# Altium PCB F4SDR2.PcbDoc (part 3 of 3)
Units mil, origin at the board's own origin, x right, y up, seen from the top; angles counter-clockwise.
Board outline 1676.41 x 2432 mil, 6 copper layers (Top Layer, GND1, PWR, PWR2/GND2, Signal Layer 1, Bottom Layer), stack 46.185 mil thick; 213 components, 239 nets, 1245 pads, 805 vias.
Unrouted connection lines stored in the file: 91.
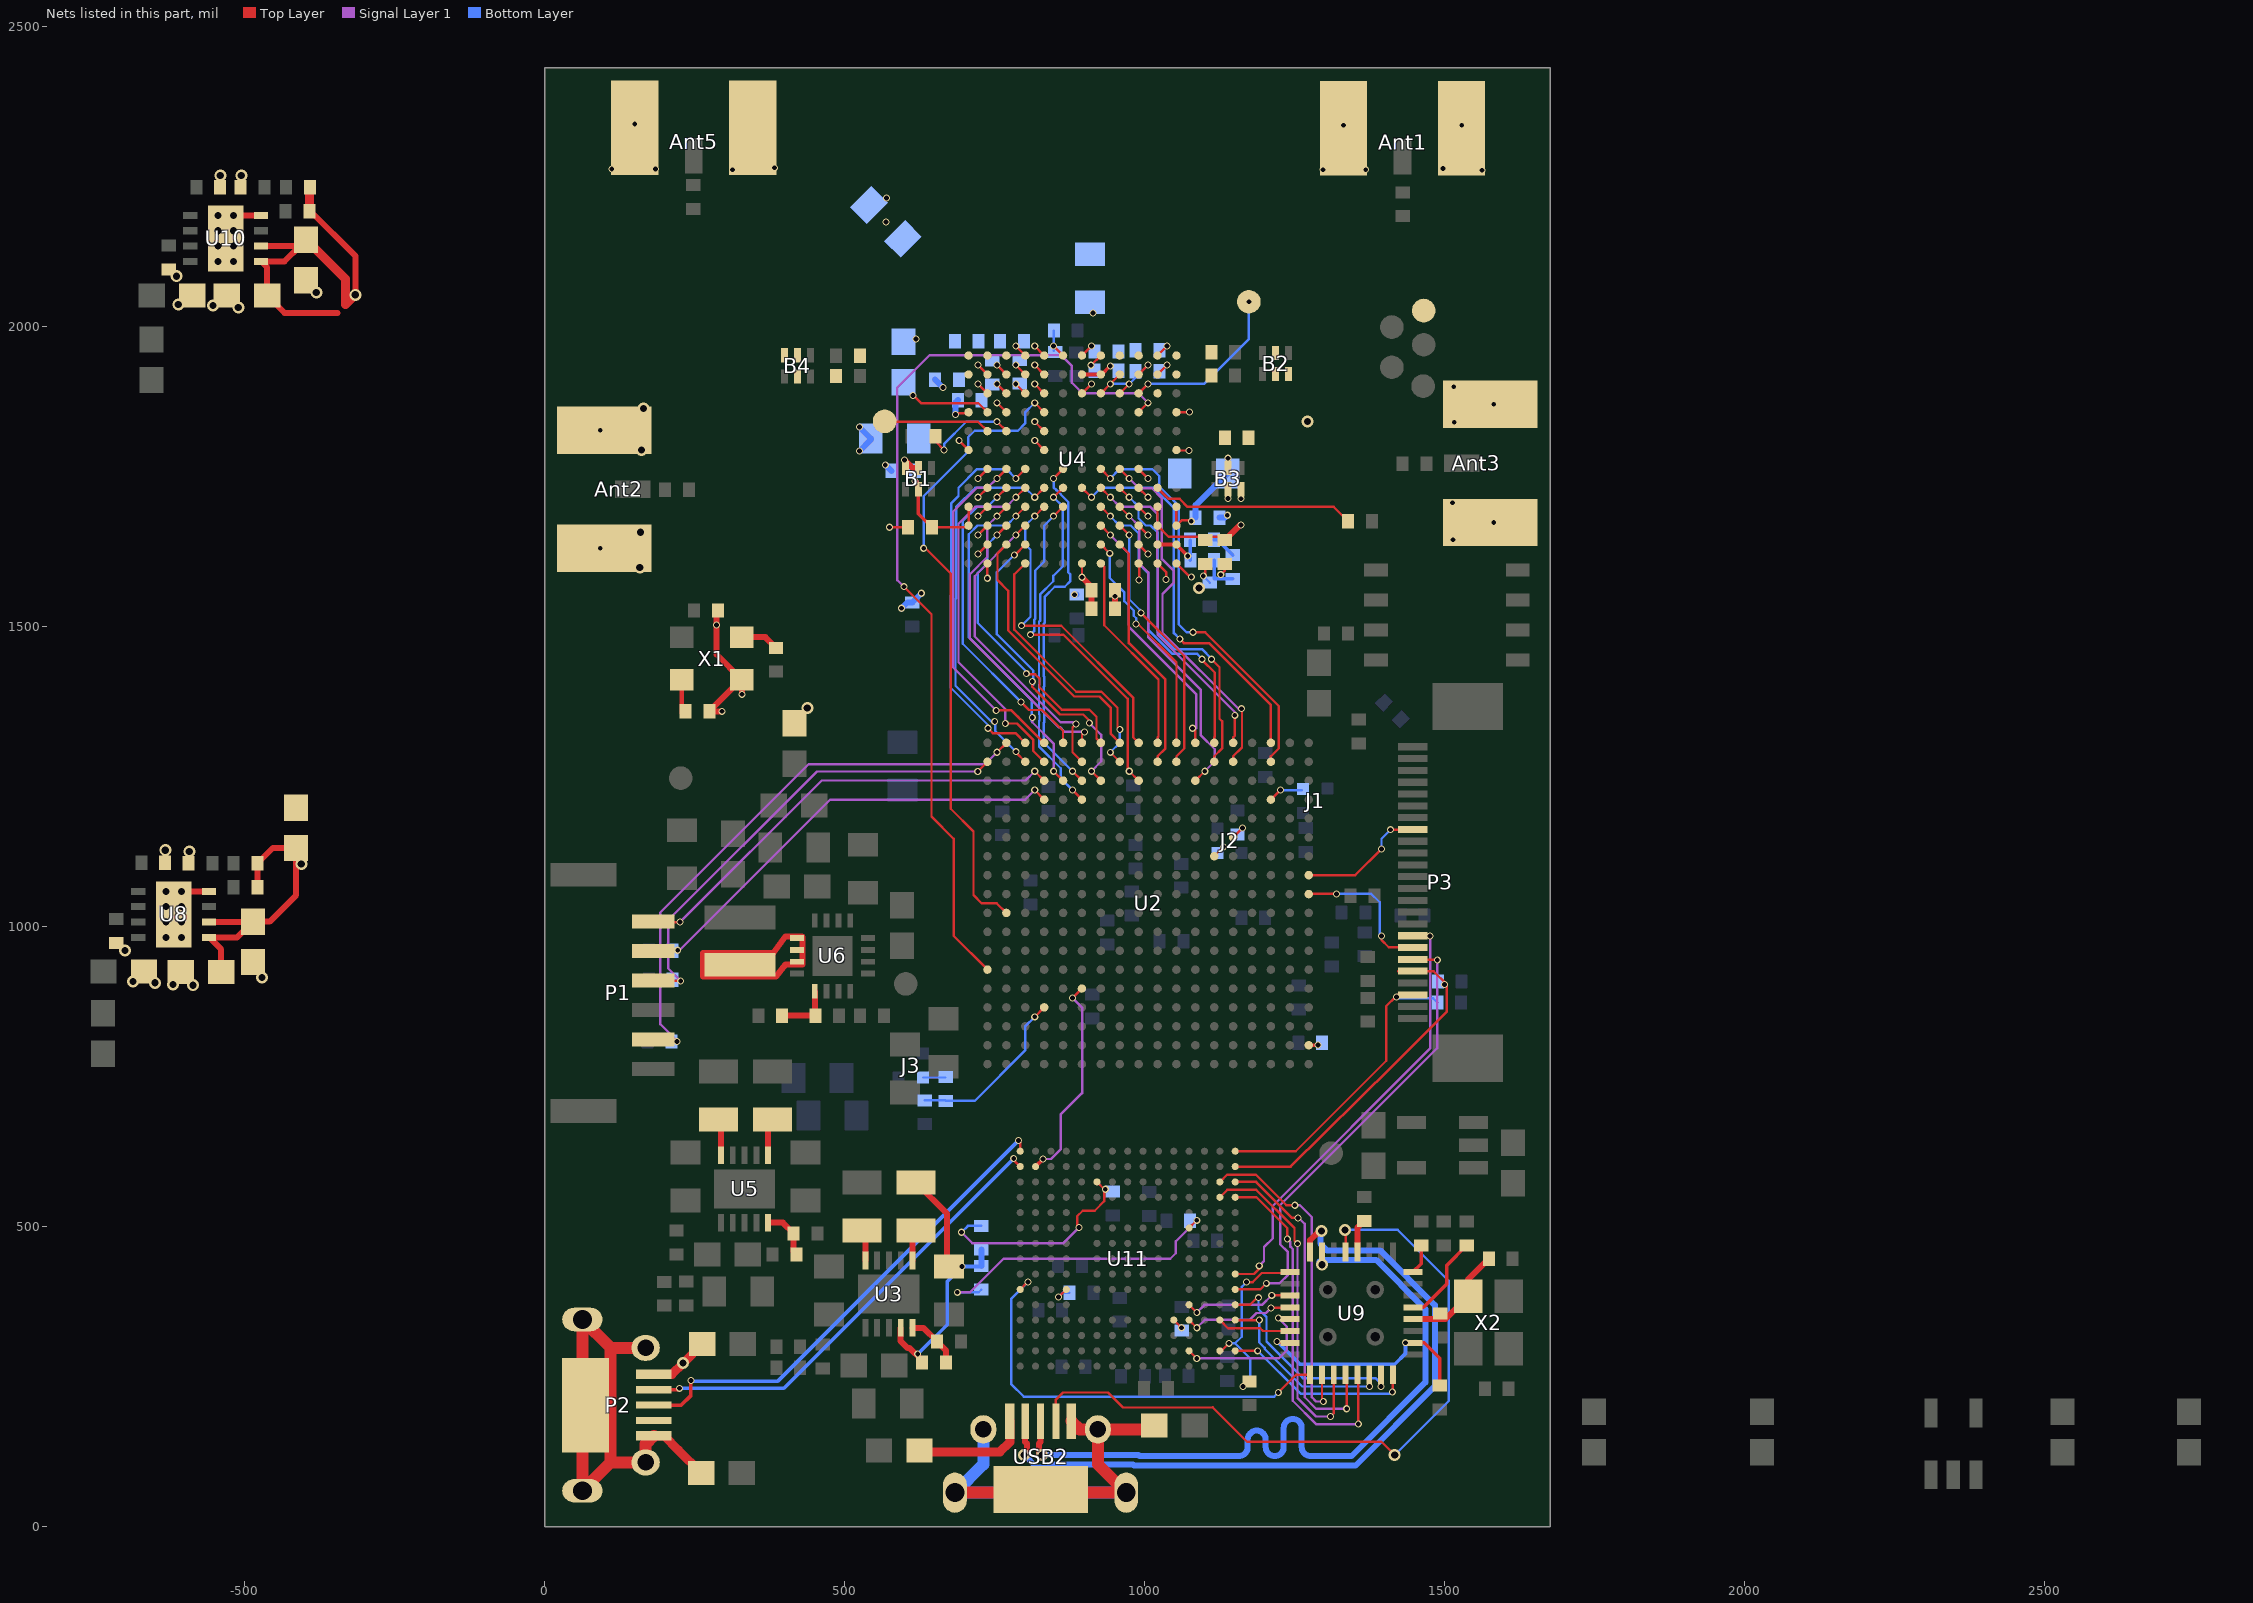
[diagram p7: the nets of this part, all layers, seen from the top]

## Via types
v1: diameter 11.81, hole 7.87, Top Layer to Bottom Layer, 680 vias
v2: diameter 20, hole 12, Top Layer to Bottom Layer, 104 vias
v3: diameter 19.68, hole 11.81, Top Layer to Bottom Layer, 20 vias
v4: diameter 12, hole 8, Top Layer to Bottom Layer, 1 vias

## Nets (pads, with @x,y where several pads share a name; then routed paths per layer and width w, separated by ;. In a path a pad name is that pad's centre, name@x,y a point inside that pad or via, vN(x,y) a via of type N, cw(c..) or ccw(c..) an arc to the next point about the centre after c; other vN are vias at no path point) (continued)
NetC66_1: C66.1 R39.1 | length 41.8
  Bottom Layer w6: R39.1@1115.68,1645 1121.68,1645 C66.1@1147,1619.68
NetC67_1: C67.1 R39.2 U4.A11 U4.B11 | length 91.9
  Top Layer w6: U4.B11@1021.73,1637.27 1052.73,1637.27 v1(1072,1618)
  Bottom Layer w6: C67.1@1076.32,1611 R39.2@1076.32,1644.68
NetC72_2: C72.2 U4.A1
NetC77_2: C77.2 U4.A2
NetC84_2: C84.2 U4.M1
NetC86_1: C86.1 U4.M2
NetC110_2: C110.2 R61.1 U9.28 X2.1 | length 184.9
  Top Layer w10: U9.28@1447.36,346.16 1501.39,346.16 X2.1@1539.54,384.31 1539.54,412.54 C110.2@1574,447
NetC111_1: C111.1 U9.29 | length 150.8
  Top Layer w6: U9.29@1447.36,365.84 1464.84,365.84 1504,405 1504,436.32 C111.1@1537,469.32
NetC112_1: C112.1 U9.15 U9.26 | length 378.4
  Top Layer w4: v1(1221,309) 1223.21,306.79 U9.15@1242.64,306.79
  Top Layer w6: U9.26@1447.36,306.79 1466.21,306.79 1492,281 C112.1@1492,235.68
  Bottom Layer w6: v1(1221,309) 1259,271 1417,271 1435,289 v1(1435,307)
NetC113_1: C113.1 X1.3 | length 64.2
  Top Layer w10: X1.3@329.01,1482.75 368.07,1482.75 C113.1@385.82,1465
NetJ1_2: J1.2 U2.T15 | length 57.8
  Top Layer w4: U2.T15@1210.72,1212.23 v1(1226.47,1227.98)
  Bottom Layer w4: v1(1226.47,1227.98) J1.2@1261.98,1227.98
NetJ2_2: J2.2 U2.N12 | length 22.3
  Top Layer w4: U2.N12@1116.24,1117.74 v1(1131.98,1133.49)
NetJ3_2: J3.2 R42.1 | length 37.3
  Bottom Layer w4: J3.2@631,749 R42.1@668.32,749
NetL1_1: L1.1 U5.6 | length 52.5
  Top Layer w10: U5.6@372.75,619.28 L1.1@372.75,671.75
NetL2_1: L2.1 U5.10 | length 55.7
  Top Layer w10: U5.10@294.01,619.28 L2.1@294.01,674.99
NetL3_1: L3.1 U3.6 | length 44.3
  Top Layer w10: U3.6@613.4,444.13 L3.1@613.4,488.4
NetL4_1: L4.1 U3.10 | length 44.2
  Top Layer w10: U3.10@534.66,444.13 L4.1@534.66,488.34
NetL13_1: L13.1 U6.1 U6.2 U6.3 | length 442.3
  Top Layer w10: 263.78,917.32 263.78,956.69 381.89,956.69 401.57,984.25 429.13,984.25 430.11,983.28 430.11,937.01 401.57,937.01 385.83,917.32 263.78,917.32
NetP2_1: P2.1 R48.2 | length 101.7
  Top Layer w15: P2.1@182.32,254.18 212.18,254.18 v2(231,273) R48.2@263,305
NetP2_5: P2.5 R49.2 | length 880.8
  Top Layer w15: P2.5@182.32,151.82 199.18,151.82 223,128 R49.2@261,90
  Top Layer w20: P2.5@168.54,298.47 110.27,298.47 ; P2.5@182.32,151.82 168.54,138.04 P2.5@168.54,107.53 110.27,107.53 ; 110.27,107.53 P2.5@63.02,60.28 P2.5@63.02,345.72 110.27,298.47 ; 110.27,107.53 110.27,298.47
NetR1_2: R1.2 R11.1 U3.5 | length 91.5
  Top Layer w10: U3.5@613.4,331.88 631.43,331.88 R11.1@654.31,309 669,294.31 R1.2@669,274
NetR5_2: R5.2 R16.1 U5.5 | length 80.4
  Top Layer w10: U5.5@372.75,507.04 397.27,507.04 R16.1@415.31,489 R5.2@415.31,458.69
NetR8_2: R8.2 R18.1 U6.5 | length 95.2
  Top Layer w10: R8.2@396,852 R18.1@451.31,852 ; R18.1@450.45,852.87 U6.5@450.45,892.71
NetR13_2: R13.2 U11.D6 | length 39.1
  Top Layer w4: v1(856.84,383.02) U11.D6@869.64,395.82
  Bottom Layer w4: v1(856.84,383.02) 863.82,390 R13.2@875,390
NetR19_1: R19.1 U4.B8 | length 340.7
  Top Layer w4: U4.B8@1021.73,1731.76 1040.23,1713.26 1058.61,1713.26 1071.87,1700 1315.32,1700 R19.1@1339.32,1676
NetR22_2: R22.2 U11.L4 | length 18.1
  Top Layer w4: U11.L4@1048.77,344.64 v1(1061.57,331.84)
NetR34_1: R34.1 X1.1 | length 55.4
  Top Layer w8: R34.1@228.62,1356.43 X1.1@228.62,1411.88
NetR35_1: R35.1 U4.L4 | length 135.7
  Top Layer w4: v1(614.17,1885.83) 614.71,1885.83 627.54,1873 723.01,1873 U4.L4@738.27,1857.74
NetR40_1: R40.1 U4.K5 | length 155.9
  Top Layer w4: R40.1@651.68,1809.31 v1(666,1795) ; v1(754.02,1841.99) U4.K5@769.76,1826.24
  Bottom Layer w4: v1(666,1795) 666,1805 702.99,1841.99 v1(754.02,1841.99)
NetR41_1: R41.1 U2.P13 | length 22.3
  Top Layer w4: U2.P13@1147.73,1149.24 v1(1163.48,1164.98)
NetR42_2: R42.2 R45.2 U2.D4 | length 285.7
  Top Layer w4: v1(817.02,850.02) U2.D4@832.77,865.77
  Bottom Layer w4: R45.2@634,711 R42.2@668,711 ; R42.2@669,710 717,710 801,794 801,834 v1(817.02,850.02)
NetR46_2: R46.2 USB2.1 | length 194.4
  Top Layer w15: R46.2@625,124.91 759.09,124.91 775.59,141.42 USB2.1@775.59,176.32
  Top Layer w20: R46.2@625,124.91 R46.2@625,127
NetR47_1: R47.1 USB2.5 | length 958.9
  Top Layer w20: USB2.5@684.06,57.02 USB2.5@969.49,57.02 922.24,104.27 USB2.5@922.24,162.54 ; USB2.5@877.95,176.32 891.73,162.54 USB2.5@922.24,162.54 ; R47.1@1010.07,162.54 USB2.5@922.24,162.54
  Bottom Layer w20: USB2.5@731.3,162.54 731.3,104.27 USB2.5@684.06,57.02 USB2.5@969.49,57.02
NetR60_2: R60.2 U9.4 | length 56.3
  Top Layer w10: U9.4@1354.84,458.36 1354.84,498.84 R60.2@1366,510
NetR62_2: R62.2 U9.32 | length 49.8
  Top Layer w6: U9.32@1447.36,424.9 1461,438.54 R62.2@1461,469
NetT1_1: T1.1 U4.B3
NetT2_1: T2.1 U4.C3 | length 285.4
  Top Layer w4: U4.C3@990.24,1889.24 v1(1005.98,1904.98)
  Bottom Layer w4: v1(1005.98,1904.98) 1098.98,1904.98 1174,1980 v1(1174,2042) v1@1174,2044
NetT3_1: T3.1 U4.L5 | length 177.3
  Top Layer w4: T3.1@567.46,1841.99 722.52,1841.99 U4.L5@738.27,1826.24
NetU9_5: U9.5 USB2.4 | length 1220.9
  Top Layer w4: USB2.4@852.36,176.32 852.36,212.36 864,224 939,224 964,199 1113,199 ; 1113.5,199.5 1171,142 1395,142 v2(1417,120) ; v2(1334,495) 1335.16,493.84 U9.5@1335.16,458.36
  Bottom Layer w4: v2(1334,495) 1422,495 1507,410 1507,210 v2(1417,120)
PA13: P2.3 U11.A15 | length 825.5
  Top Layer w4: v1(790,644) 792.87,641.13 U11.A15@792.87,626.13
  Top Layer w6: P2.3@182.32,203 228,203 244,219 v1(244,244)
  Bottom Layer w6: v1(244,244) 244,243 389,243 v1(790,644)
PA14: P2.2 U11.A14 | length 781.8
  Top Layer w4: v1(782,614) 779,614 792.46,600.54 U11.A14@792.87,600.54
  Top Layer w6: P2.2@182.32,228.59 222.59,228.59 v1(225,231)
  Bottom Layer w6: v1(225,231) 399,231 v1(782,614)
PB3: P2.4
PCLK: P3.17 U2.V11 | length 215
  Top Layer w4: U2.V11@1273.72,1086.24 1351.24,1086.24 v1(1395,1130) ; v1(1410,1162) 1446.85,1162 P3.17@1447.23,1162.39
  Bottom Layer w4: v1(1395,1130) 1395,1147 v1(1410,1162)
PROGRAM: R9.2 U2.V2 | length 15.4
  Top Layer w6: U2.V2@1273.72,802.78 1288.78,802.78 v1(1289,803)
PWDN: P3.8 U11.R7 | length 750
  Top Layer w4: U11.R7@1151.13,421.41 1182.41,421.41 1195,434 1193.91,435.09 v1(1191.26,435.09) ; P3.8@1447.23,985.22 1475.78,985.22 v1(1476,985)
  Signal Layer 1 w4: v1(1191.26,435.09) 1199.09,442.93 1199.09,466.26 1213.91,481.07 1213.91,535.22 1476,797.31 v1(1476,985)
RESET: P3.6 U11.R6 | length 777.9
  Top Layer w4: U11.R6@1151.13,395.82 1192.82,395.82 v1(1203,406) ; P3.6@1447.23,945.85 1448.08,945 v1(1488,945)
  Signal Layer 1 w4: v1(1203,406) 1225,406 1239,420 1239,458 1226,471 1226,536 1488,798 v1(1488,945)
RFGND: Ant1.GND Ant2.GND Ant3.GND Ant5.GND B1.5 B1.6 B2.2 B2.5 B2.6 B3.5 B3.6 B4.2 B4.5 B4.6 C17.1 C18.1 C19.1 C21.1 C22.1 C23.1 C24.1 C25.1 C27.1 C28.1 C43.2 C47.2 C49.2 C50.2 C51.2 C52.2 C53.2 C54.1 C56.2 C57.2 C58.2 C59.2 C60.2 C61.2 C62.2 C63.2 C64.2 C65.2 C66.2 C67.2 C70.1 C73.2 C75.2 C80.2 C82.1 C83.2 C93.2 R24.2 R30.2 R34.2 R35.2 R52.1 R53.1 R54.1 R55.1 U4.A4 U4.A6 U4.A12 U4.B1 U4.B2 U4.B12 U4.C1 U4.C2 U4.C7 U4.C8 U4.C9 U4.C10 U4.C11 U4.C12 U4.D1 U4.E1 U4.F1 U4.F3 U4.G1 U4.H1 U4.H2 U4.H3 U4.H5 U4.H6 U4.J1 U4.J2 U4.K1 U4.K2 U4.L1 U4.L2 U4.L3 U4.L7 U4.L8 U4.L9 U4.L10 U4.L11 U4.L12 U4.M4 U4.M6 U8.0 U8.4 U10.0 U10.4 X1.2 | length 1613.5
  Top Layer w4: v1(575,1666) C75.2@606,1666 ; v1(684.91,1853.9) 682.8,1856 U4.M4@705.03,1856 ; v1(691.02,1810.5) U4.M6@706.77,1794.75 ; U4.M4@704.03,1855 U4.M4@705.03,1856 ; U4.M4@706.77,1857.74 U4.M4@705.03,1856 ; v1(722.52,1621.52) U4.L11@738.27,1637.27 ; v1(722.52,1653.02) U4.L10@738.27,1668.76 ; v1(722.52,1684.51) U4.L9@738.27,1700.26 ; v1(722.52,1716.01) U4.L8@738.27,1731.76 ; v1(722.52,1747.5) U4.L7@738.27,1763.25 ; v1(722.52,1904.98) U4.L3@738.27,1889.24 ; v1(722.52,1936.48) U4.L2@738.27,1920.73 ; v1(738,1581) 738,1605.5 U4.L12@738.27,1605.77 ; v1(754.02,1936.48) U4.K2@769.76,1920.73 ; v1(785.51,1936.48) U4.J2@801.26,1920.73 ; v1(785.51,1967.98) U4.J1@801.26,1952.23 ; v1(817.01,1810.5) U4.H6@832.76,1794.75 ; v1(817.01,1841.99) U4.H5@832.76,1826.24 ; v1(817.01,1904.98) U4.H3@832.76,1889.24 ; v1(817.01,1936.48) U4.H2@832.76,1920.73 ; v1(817.01,1967.98) U4.H1@832.76,1952.23 ; v1(848.5,1967.98) U4.G1@864.25,1952.23 ; U4.F3@895.75,1889.24 v1(911.5,1904.98) ; U4.F1@895.75,1952.23 v1(911.5,1967.98) ; v1(911,1936) U4.E1@927.24,1952.23 ; U4.C12@990.24,1605.77 991,1605.01 v1(991,1578) ; U4.C11@990.24,1637.27 v1(1005.98,1621.52) ; U4.C10@990.24,1668.76 v1(1005.98,1653.02) ; U4.C9@990.24,1700.26 v1(1005.98,1684.51) ; U4.C8@990.24,1731.76 v1(1005.98,1716.01) ; U4.C7@990.24,1763.25 v1(1005.98,1747.5) ; U4.C2@990.24,1920.73 v1(1005.98,1936.48) ; U4.B12@1021.73,1605.77 1036,1591.5 v1(1036,1579) ; U4.B2@1021.73,1920.73 v1(1037.48,1936.48) ; U4.B1@1021.73,1952.23 v1(1037.48,1967.98) ; U4.A12@1053.23,1605.77 1076,1583 v1(1078,1583) ; U4.A6@1053.23,1794.75 1053.98,1794 v1(1074,1794) ; U4.A4@1053.23,1857.74 1053.49,1858 v1(1075,1858) ; v1@1101,1588 C57.2@1101,1605 ; v1(1127,1587) 1134,1594 C56.2@1134,1605
  Top Layer w10: U8.0@-601.02,1059.26 U8.4@-558.97,1059.26 ; U10.0@-508.35,2185.84 U10.4@-472.29,2185.84 ; C93.2@288.82,1527.31 286.82,1525.31 v1(286.82,1503.31) 286.82,1454.08 X1.2@329.01,1411.88 ; v1(295.82,1359.31) R34.2@274.82,1359.31 327.38,1411.88 X1.2@329.01,1411.88 ; v1(329.01,1387.51) X1.2@329.01,1411.88 ; v1(599.91,1778.23) v1@601.35,1776.79 ; B1.6@601.35,1764.72 v1@601.35,1776.79 ; B1.5@623,1764.72 613.42,1764.72 v1@601.35,1776.79 ; C47.2@951,1530 951,1533 C43.2@951,1561 ; v1@951,1546.85 v1(951,1551.18) ; v1(1139,1714) B3.5@1139,1729.28 ; v1(1160.65,1713.65) B3.6@1160.65,1729.28
  Signal Layer 1 w4: v1@683.1,1853.9 v1(684.91,1853.9)
  Bottom Layer w4: C63.2@849,1960 C62.2@849,1994 ; v1(1098,1585) 1098,1584.69 R55.1@1109,1573.69
  Bottom Layer w6: R55.1@1116,1580.69 C67.2@1116,1611 ; R55.1@1116.69,1580 C66.2@1147,1580
  Bottom Layer w10: v1(525,1793) 544,1812 C82.1@544,1814 v1(525,1833) ; v1(568,1770) C83.2@578,1760 ; v1(595,1531) 604.68,1540.69 R54.1@613,1540.69 628,1555.69 v1(628,1556) ; C51.2@651,1912 v1(664,1899) ; v1(684.91,1853.9) 684.91,1873.91 C50.2@689,1878 ; v1(883.32,1553.69) R52.1@887,1553.69 ; C80.2@1125,1682 1134,1682 v1(1138,1686)
  other v1: 92.81,1630.95 1514.19,1645.11 1582.19,1674.11 1513.19,1707.11 92.81,1827.8 1516.19,1841.11 1582.19,1870.96 1515.19,1900.11 619,1980 569,2175 570,2215 1562.52,2261.13 313.17,2262.13 1297.52,2262.13 1368.52,2262.13 112.17,2263.13 185.17,2263.13 1497.52,2264.13 383.17,2265.13 1331.67,2336.13 1528.52,2336.13 150.32,2338.13
  other v2: -586.02,902.87 -619.02,903.87 -649.02,906.87 -686.02,908.87 -471.02,915.87 -699.02,960.87 -592.02,1125.87 -632.02,1127.87 438,1365 1091,1565 158.81,1598.8 159.81,1657.8 161.81,1794.8 1271.65,1842.52 164.81,1863.8 -510.35,2032.46 -552.35,2035.46 -610.35,2037.46 -380.35,2057.46 -613.35,2084.46 -540.35,2252.46 -505.35,2252.46
  other v3: -630.82,982.49 -605.23,982.49 -630.82,1008.08 -605.23,1008.08 -630.82,1033.67 -605.23,1033.67 -630.82,1059.26 -605.23,1059.26 -544.14,2109.07 -518.55,2109.07 -544.14,2134.66 -518.55,2134.66 -544.14,2160.25 -518.55,2160.25 -544.14,2185.84 -518.55,2185.84
RX_D0_N: U2.H18 U4.K11 | length 445.7
  Top Layer w4: U4.K11@769.76,1637.27 755,1622.5 755,1578 773,1560 773,1494 883,1384 925,1384 944,1365 944,1321.47 U2.H18@958.76,1306.72
RX_D0_P: U2.H17 U4.J12 | length 449.1
  Top Layer w4: U4.J12@801.26,1605.77 783.09,1587.61 783.09,1495.22 886.31,1392 928.31,1392 955,1365.31 955,1332 958,1329 v1(958.91,1329) ; v1(943,1290.98) U2.H17@958.76,1275.22
  Bottom Layer w4: v1(943,1290.98) 958.91,1306.88 v1(958.91,1329)
RX_D1_N: U2.G18 U4.K10 | length 494.5
  Top Layer w4: v1(754.02,1653.02) U4.K10@769.76,1668.76 ; v1@805.42,1424.42 808.93,1420.91 817.93,1420.91 824.91,1413.93 824.91,1399.41 862.31,1362 908.31,1362 920,1350.31 920,1313.98 U2.G18@927.26,1306.72
  Bottom Layer w4: v1(754.02,1653.02) 738,1637 738,1606 722,1590 722,1506.69 v1@801.34,1427.34
  other v1: 803,1422
RX_D1_P: U2.G16 U4.J11 | length 540.1
  Top Layer w4: v1(783,1620) 783.99,1620 U4.J11@801.26,1637.27 ; v1(813,1409) 813,1400 816.16,1396.84 820.84,1392.16 859,1354 898,1354 912,1340 v1(908,1340) ; v1(911.51,1259.47) U2.G16@927.26,1243.72
  Signal Layer 1 w4: v1(908,1340) 928,1320 928,1275.96 v1(911.51,1259.47)
  Bottom Layer w4: v1(783,1620) 754,1591 754,1487.84 814.91,1426.93 814.91,1403.55 813,1405.45 v1(813,1409)
RX_D2_N: U2.F18 U4.K9 | length 514.3
  Top Layer w4: v1(754.02,1684.51) U4.K9@769.76,1700.26 ; U2.F18@895.76,1306.72 895.76,1320.76
  Signal Layer 1 w4: v1(754.02,1684.51) 738,1668.5 738,1616.82 709,1587.82 709,1480.69 856.69,1333 859,1333 867,1325 v1(900,1325)
RX_D2_P: U2.F17 U4.J10 | length 520.8
  Top Layer w4: v1(785.51,1653.02) U4.J10@801.26,1668.76 ; v1(885.91,1338) 880,1332.09 880,1290.98 U2.F17@895.76,1275.22
  Signal Layer 1 w4: v1(785.51,1653.02) 717,1584.5 717,1484 860,1341 882,1341 885,1338 v1(885.91,1338)
RX_D3_N: U2.E18 U4.K8 | length 547.3
  Top Layer w4: v1(754.02,1716.01) U4.K8@769.76,1731.76 ; v1(794,1375) 807.55,1361.45 829.55,1361.45 864.12,1326.88 U2.E18@864.12,1306.72
  Bottom Layer w4: v1(754.02,1716.01) 738.01,1700 721,1700 697,1676 697,1472 v1(794,1375)
RX_D3_P: U2.E16 U4.J9 | length 601
  Top Layer w4: v1(785.51,1684.51) U4.J9@801.26,1700.26 ; v1(848.52,1259.47) U2.E16@864.27,1243.72
  Signal Layer 1 w4: v1(813,1349) 813,1341 848.52,1305.48 v1(848.52,1259.47)
  Bottom Layer w4: v1(785.51,1684.51) 770,1669 721.56,1669 707,1654.44 707,1483 812.41,1377.59 812.41,1343.05 813,1343.64 v1(813,1349)
RX_D4_N: U2.D18 U4.K7 | length 581.6
  Top Layer w4: v1(752.82,1360.82) 778.34,1360.82 789.07,1350.09 789.39,1350.09 U2.D18@832.77,1306.72 ; v1(754.02,1747.5) U4.K7@769.76,1763.25
  Signal Layer 1 w4: v1(752.82,1360.82) 681,1432.64 681,1692 721,1732 738.51,1732 v1(754.02,1747.5)
RX_D4_P: U2.D17 U4.J8 | length 603.4
  Top Layer w4: v1(768,1339) 787.5,1339 814.36,1312.14 814.36,1293.63 U2.D17@832.77,1275.22 ; v1(785.51,1716.01) U4.J8@801.26,1731.76
  Signal Layer 1 w4: v1(768,1339) 768,1363 690,1441 690,1672 718,1700 769.5,1700 v1(785.51,1716.01)
RX_D5_N: U2.C18 U4.J7 | length 643.4
  Top Layer w4: v1(739.08,1331.08) 747.16,1323 784.99,1323 U2.C18@801.28,1306.72 ; v1(785.51,1747.5) U4.J7@801.26,1763.25
  Bottom Layer w4: v1(739.08,1331.08) 741.34,1333.34 741.34,1334.34 677,1398.69 677,1551.66 678,1552.66 678,1705.5 677.75,1705.75 690,1718 690,1732 721,1763 770.02,1763 v1(785.51,1747.5)
RX_D5_P: U2.C17 U4.H8 | length 651.6
  Top Layer w4: v1(786,1292) 786,1290.5 U2.C17@801.28,1275.22 ; v1(817.01,1716.01) U4.H8@832.76,1731.76
  Bottom Layer w4: v1(786,1292) 750.99,1327.01 750.99,1341.54 v1(750.26,1342.26) 748,1340 747,1340 685,1402 685,1547 686,1548 686,1700 718,1732 801.02,1732 v1(817.01,1716.01)
RX_FRAME_N: U2.F16 U4.G7 | length 593.1
  Top Layer w4: v1(848.5,1747.5) U4.G7@864.25,1763.25 ; v1(880.02,1259.47) U2.F16@895.76,1243.72
  Bottom Layer w4: v1(848.5,1747.5) 848.5,1732.5 853.09,1727.91 853.44,1727.91 860.41,1720.94 860.41,1720.59 873,1708 873,1590.84 875.91,1587.93 875.91,1575.91 867,1567 850.31,1567 834,1550.69 834,1507.06 832.16,1505.22 832.16,1417.99 832.91,1417.25 832.91,1400.75 832.16,1400.01 832.16,1357.99 832.91,1357.25 832.91,1340.75 832.16,1340.01 832.16,1307.33 v1(880.02,1259.47)
RX_FRAME_P: U2.F15 U4.G8 | length 579.9
  Top Layer w4: v1(848.5,1716.01) U4.G8@864.25,1731.76 ; v1(880.02,1227.98) U2.F15@895.76,1212.23
  Bottom Layer w4: v1(848.5,1716.01) 864,1700.51 864,1601 848,1585 848,1576 826,1554 826,1510.37 824.16,1508.53 824.16,1414.68 824.91,1413.93 824.91,1404.07 824.16,1403.32 824.16,1354.68 824.91,1353.93 824.91,1344.07 824.16,1343.32 824.16,1300.67 860.43,1264.4 860.43,1247.57 v1(880.02,1227.98)
SCL: P3.5 R57.2 U11.R14 | length 599.4
  Top Layer w4: U11.R14@1151.13,600.54 1243.54,600.54 1414,769 1504,859 v1@1504,904 ; P3.5@1423.17,926.17 P3.5@1447.23,926.17 1481.83,926.17 v1@1504,904 ; v1@1499,904 v1(1500,904) v1@1504,904
SCLK: U2.F5 U11.B14 | length 349.7
  Top Layer w4: v1(880.02,881.52) U2.F5@895.76,897.27
  Top Layer w6: U11.B14@818.46,600.54 v1(831,613.09)
  Signal Layer 1 w4: v1(831,613.09) 844.09,613.09 860.09,629.09 860.09,687.09 896,723 896,865.54 v1(880.02,881.52)
SDA: P3.3 R56.2 U11.R15 | length 509.4
  Top Layer w4: U11.R15@1151.13,626.13 1252.13,626.13 1403,777 1403,868 v1@1419,884 ; v1(1420,883) v1@1419,884 ; P3.3@1424,889 v1@1419,884
  Bottom Layer w4: v1(1420,883) 1420,881 1481,881 R56.2@1488,874
TCK: P1.3 R3.1 U2.A17 | length 802.7
  Top Layer w4: P1.3@175.69,910 v1(227,910) ; v1(722.06,1259) U2.A17@738.28,1275.22
  Signal Layer 1 w4: v1(227,910) 206,931 206,1011 454,1259 v1(722.06,1259)
TDI: P1.2 R2.1 U2.D15 | length 779.5
  Top Layer w4: P1.2@175.09,959.82 220.82,959.82 v1(222,961) ; v1(817.02,1227.98) U2.D15@832.77,1212.23
  Signal Layer 1 w4: v1(222,961) 222,958 476,1212 801.05,1212 v1(817.02,1227.98)
TDO: P1.1 U2.D16 | length 767.3
  Top Layer w4: P1.1@176.12,1008 v1(226,1008) ; v1(817.02,1259.47) U2.D16@832.77,1243.72
  Signal Layer 1 w4: v1(226,1008) 462,1244 801.55,1244 v1(817.02,1259.47)
TEST/ENABLE: U2.A6 U4.C4 | length 1544.4
  Top Layer w4: v1(599,1567) 645,1521 645,1183.75 682,1146.75 682,985.05 U2.A6@738.28,928.76 ; U4.C4@990.24,1857.74 v1(1005.98,1873.49)
  Signal Layer 1 w4: v1(599,1567) 588,1578 588,1899 642,1953 861,1953 879,1935 879,1907 896.53,1889.47 990,1889.47 v1(1005.98,1873.49)
TMS: P1.5 R6.1 U2.B18 | length 967.7
  Top Layer w4: P1.5@175.09,812.18 178.27,809 v1(221,809) ; v1(754.06,1291) U2.B18@769.78,1306.72
  Signal Layer 1 w4: v1(221,809) 221,810 193,838 193,1024 440,1271 734.06,1271 v1(754.06,1291)
TX_D0_N: U2.K18 U4.E12 | length 339.5
  Top Layer w4: U4.E12@927.24,1605.77 933,1600.02 933,1502.69 1023.34,1412.34 1023.34,1317.4 1021.75,1315.8 U2.K18@1021.75,1306.72
TX_D0_P: U2.K17 U4.D11 | length 399
  Top Layer w4: U4.D11@958.74,1637.27 974,1622.01 974,1473 1034.83,1412.17 1034.83,1297.39 1021.75,1284.31 U2.K17@1021.75,1275.22
TX_D1_N: U2.L18 U4.E11 | length 379.7
  Top Layer w4: U4.E11@927.24,1637.27 v1(942,1622.51) ; v1@990.5,1503.5 1053.24,1440.76 U2.L18@1053.24,1306.72
  Bottom Layer w4: v1(942,1622.51) 942,1581.62 966.49,1557.13 966.49,1542.85 982.19,1527.15 982.19,1518.5 986.34,1514.34 986,1514 v1(986,1505)
TX_D1_P: U2.L17 U4.D10 | length 448.1
  Top Layer w4: U4.D10@958.74,1668.76 v1(974.49,1653.02) ; v1@993.43,1523.43 v1(994.09,1523.43) 1066.33,1451.19 1066.33,1297.39 1053.24,1284.31 U2.L17@1053.24,1275.22
  Bottom Layer w4: v1(974.49,1653.02) 974.49,1546.17 992,1528.65 v1@992,1520 ; v1@994.09,1522.09 v1(994.09,1523.43)
TX_D2_N: U2.M18 U4.E10 | length 435.8
  Top Layer w4: U4.E10@927.24,1668.76 v1(942.99,1653.02) ; v1(1080,1331) 1084.74,1326.26 U2.M18@1084.74,1306.72
  Signal Layer 1 w4: v1(942.99,1653.02) 974,1622.01 974,1503.69 974.09,1503.59 974.09,1500.07 1086,1388.16 1086,1331 v1(1080,1331)
TX_D2_P: U2.M16 U4.D9 | length 535.5
  Top Layer w4: U4.D9@958.74,1700.26 v1(974.49,1684.51) ; U2.M16@1084.74,1243.72 v1(1100.49,1259.47)
  Signal Layer 1 w4: v1(974.49,1684.51) 991,1668 991,1606 1006,1591 1006,1483 1094,1395 1094,1319 1117,1296 1117,1275.98 v1(1100.49,1259.47)
TX_D3_N: U2.N18 U4.E9 | length 507.5
  Top Layer w4: U4.E9@927.24,1700.26 v1(942.99,1684.51) ; v1(1096,1446) 1096,1444.97 1117,1423.97 1117,1316.57 1116.24,1315.8 U2.N18@1116.24,1306.72
  Bottom Layer w4: v1(942.99,1684.51) 958.5,1669 977,1669 990,1656 990,1606 1006,1590 1006,1495.69 1046.69,1455 1088,1455 1096,1447 v1(1096,1446)
TX_D3_P: U2.N17 U4.D8 | length 564.2
  Top Layer w4: U4.D8@958.74,1731.76 v1(974.49,1716.01) ; v1(1111.81,1446) 1125,1432.81 1125,1347 1129.32,1342.68 1129.32,1297.39 1116.24,1284.31 U2.N17@1116.24,1275.22
  Bottom Layer w4: v1(974.49,1716.01) 990,1700.5 990,1681 1002,1669 1010,1669 1022,1657 1022,1491 1050,1463 1095.84,1463 1111.81,1447.03 v1(1111.81,1446)
TX_D4_N: U2.P18 U4.E8 | length 549.2
  Top Layer w4: U4.E8@927.24,1731.76 v1(942.99,1716.01) ; U2.P18@1147.73,1306.72 1147.73,1315.8 1150.58,1318.65 v1(1150.58,1352.58)
  Signal Layer 1 w4: v1(942.99,1716.01) 959,1700 1010,1700 1021,1689 1021,1609.69 1022,1608.69 1022,1486.69 1151.34,1357.34 1151.34,1353.34 v1(1150.58,1352.58)
TX_D4_P: U2.P17 U4.D7 | length 610.5
  Top Layer w4: U4.D7@958.74,1763.25 v1(974.49,1747.5) ; U2.P17@1147.73,1275.22 1147.73,1284.31 1162.49,1299.06 1162.49,1363.04 v1(1161.76,1363.76)
  Signal Layer 1 w4: v1(974.49,1747.5) 990.99,1731 1012,1731 1029,1714 1029,1613 1049,1593 1049,1574 1030,1555 1030,1490 1157,1363 1161,1363 v1(1161.76,1363.76)
TX_D5_N: U2.T18 U4.F8 | length 663.4
  Top Layer w4: U4.F8@895.75,1731.76 v1(911.5,1716.01) ; v1(1058.82,1479.82) 1065.64,1473 1107.69,1473 1210.72,1369.96 U2.T18@1210.72,1306.72
  Bottom Layer w4: v1(911.5,1716.01) 927.49,1732 1015,1732 1049,1698 1049,1489.64 v1(1058.82,1479.82)
TX_D5_P: U2.T17 U4.E7 | length 697.5
  Top Layer w4: U4.E7@927.24,1763.25 v1(942.99,1747.5) ; v1(1081,1491) 1101,1491 1223.81,1368.19 1223.81,1297.39 1210.72,1284.31 U2.T17@1210.72,1275.22
  Bottom Layer w4: v1(942.99,1747.5) 958.49,1763 1013,1763 1024.66,1751.34 1024.66,1734.34 1045.31,1713.69 1045.31,1713.51 1048.83,1710 1049,1710 1057,1702 1057,1504 1070,1491 v1(1081,1491)
TX_FRAME_N: U2.J18 U4.H9 | length 536.4
  Top Layer w4: v1(795,1502) 861.31,1502 981,1382.31 981,1315.97 U2.J18@990.25,1306.72 ; v1(817.01,1684.51) U4.H9@832.76,1700.26
  Bottom Layer w4: v1(795,1502) 810,1517 810,1628.53 801,1637.53 801,1668.5 v1(817.01,1684.51)
TX_FRAME_P: U2.J16 U4.G9 | length 585.9
  Top Layer w4: v1(810,1487) 865,1487 971.84,1380.16 971.84,1262.13 v1(974.5,1259.47) U2.J16@990.25,1243.72 ; v1(848.5,1684.51) U4.G9@864.25,1700.26
  Bottom Layer w4: v1(810,1487) 816,1493 816,1511.69 818,1513.69 818,1594 833,1609 833,1669.01 v1(848.5,1684.51)
TXNRX: U2.B9 U4.H4 | length 1064.8
  Top Layer w4: v1(632,1631) 635,1631 677,1589 677,1197 715,1159 715,1053 728.48,1039.52 753.52,1039.52 U2.B9@769.78,1023.25 ; v1(817.01,1873.49) U4.H4@832.76,1857.74
  Bottom Layer w4: v1(632,1631) 632,1718 706,1792 706,1816 717,1827 789,1827 801,1839 801,1857.48 v1(817.01,1873.49)
USB_HS_CK: U9.14 U11.P4 | length 124.6
  Top Layer w4: U11.P4@1125.54,344.64 1139.18,331 1193,331 1197.53,326.47 U9.14@1242.64,326.47
USB_HS_D0: U9.24 U11.R2 | length 321.6
  Top Layer w4: U11.R2@1151.13,293.46 v1(1188.54,293.46) ; v1(1413,225) 1413.9,225.9 U9.24@1413.9,253.64
  Bottom Layer w4: v1(1188.54,293.46) 1259.91,222.09 1410.09,222.09 v1(1413,225)
USB_HS_D1: U9.23 U11.R5 | length 350
  Top Layer w4: U11.R5@1151.13,370.23 1175.77,370.23 1187.54,382 v1(1190,382)
  Bottom Layer w4: v1(1190,382) 1190,362.84 1203.27,349.57 ; 1203.27,346.73 1203.27,349.57 ; v1(1394,234) 1394,239 1385,248 1264,248 1203.27,308.73 1203.27,349.57
USB_HS_D2: U9.22 U11.R4 | length 292.5
  Top Layer w4: U11.R4@1151.13,344.64 v1(1191.36,344.64)
  Bottom Layer w4: v1(1191.36,344.64) 1191.36,307.47 1200.45,298.39 1200.45,296.55 1263,234 v1(1375,234)
USB_HS_D3: U9.21 U11.R12 | length 601
  Top Layer w4: U11.R12@1151.13,549.36 1186.64,549.36 1238,498 v1(1238,480) ; v1(1356.36,171.36) U9.21@1356.36,252.12
  Signal Layer 1 w4: v1@1241.36,476.64 1243.09,474.91 1243.09,467.07 1247,463.16 1247,210.36 1286,171.36 v1(1356.36,171.36)
USB_HS_D4: U9.20 U11.R13 | length 566.6
  Top Layer w4: U11.R13@1151.13,574.95 1185.95,574.95 1245.91,515 v1(1255.91,515) ; v1(1336.95,196.95) U9.20@1336.95,251.84
  Signal Layer 1 w4: v1(1255.91,515) 1257,515 1266.95,505.05 1266.95,216 1286,196.95 v1(1336.95,196.95)
USB_HS_D5: U9.19 U11.P12 | length 581
  Top Layer w4: U11.P12@1125.54,549.36 1138.18,562 1186,562 1250,498 1250,477 v1(1255,472) ; v1(1310,184) 1315.47,189.47 U9.19@1315.47,253.64
  Signal Layer 1 w4: v1(1255,472) 1255,215 1286,184 v1(1310,184)
USB_HS_D6: U9.18 U11.P13 | length 555.3
  Top Layer w4: U11.P13@1125.54,574.95 1137.59,587 1185.54,587 1236.54,536 v1(1250.54,536) ; U9.18@1295.79,253.64 1295.79,211.21 v1(1298,209)
  Signal Layer 1 w4: v1(1250.54,536) 1259,536 1279,516 1279,216 1286,209 v1(1298,209)
USB_HS_D7: U9.17 U11.A6 | length 722
  Top Layer w4: U11.A6@792.87,395.82 805.05,408 v1(806,408) ; v1(1223,224) 1252.64,253.64 U9.17@1276.1,253.64
  Bottom Layer w4: v1(806,408) 777.69,379.69 777.69,238.31 799,217 1216,217 v1(1223,224)
USB_HS_DIR: U9.12 U11.M4 | length 186.5
  Top Layer w4: U11.M4@1074.36,344.64 v1(1087.16,331.84) ; v1(1211,365) U9.12@1241.8,365
  Signal Layer 1 w4: v1(1087.16,331.84) 1100.32,345 1174.89,345 1186.43,356.54 1202.54,356.54 v1(1211,365)
USB_HS_N: U9.8 USB2.2 | length 1247.5
  Top Layer w10: v2(798.98,120) 803.98,125 803.98,138.99 801.18,141.79 USB2.2@801.18,176.32 ; U9.8@1276.1,458.36 1276.1,478.1 1291,493 v2(1295,493)
  Bottom Layer w10: v2(798.98,120) 799.28,120 820.28,99 837.68,99 842.68,104 980.69,104 982.69,102 1351.63,102 1484,234.37 1484,369.63 1392.63,461 1304,461 1293,472 1293,493 v2(1295,493)
USB_HS_NXT: U9.11 U11.M5 | length 184.9
  Top Layer w4: U11.M5@1074.36,370.23 v1(1087.16,357.43) ; v1(1212,386) U9.11@1242.17,386
  Signal Layer 1 w4: v1(1087.16,357.43) 1099.73,370 1196,370 v1(1212,386)
USB_HS_P: U9.7 USB2.3 | length 1247.5
  Top Layer w10: USB2.3@826.77,176.32 826.77,141.79 823.98,138.99 823.98,125 v2(828.98,120)
  Bottom Layer w10: v2(828.98,120) 990,120 992,118 1157,118 ccw(c1157,133) 1172,133 1172,145.43 cw(c1187,145.43) 1187,160.43 cw(c1187,145.43) 1202,145.43 1202,133 ccw(c1217,133) 1217,118 ccw(c1217,133) 1232,133 1232,164.95 cw(c1247,164.95) 1247,179.95 cw(c1247,164.95) 1262,164.95 1262,133 ccw(c1277,133) 1277,118 1288,118 1345,118 1468,241 1468,363 1386,445 1296,445 1295,445 1292,442 1292,441 v2(1296,437)
USB_HS_RESET: R64.1 U9.9 U11.P2 | length 305.1
  Top Layer w4: U11.P2@1125.54,293.46 1128.46,293.46 v1(1141,306) ; v1(1170,408) 1180.31,408 1195.5,423.19 U9.9@1240.93,423.19
  Bottom Layer w4: v1(1141,306) 1151,306 ; v1(1164,234) 1176,246 1176,281 1151,306 ; v1(1170,408) 1162,400 1162,317 1151,306
USB_HS_STP: U9.13 U11.M2 | length 233.1
  Top Layer w4: U11.M2@1074.36,293.46 v1(1087,280.82)
  Signal Layer 1 w4: v1(1087,280.82) 1223.82,280.82 1237,294 1237,334 v1(1223,348)
V1.32: C7.2 L3.2 R1.1 R28.2 R33.2 U3.4 | length 494.1
  Top Layer w4: C7.2@674,434 v1(696,434)
  Top Layer w10: U3.4@593.72,331.88 593.72,309.6 605.31,298 608.73,298 629.31,277.41 R1.1@629.31,274 ; L3.2@619,574 671.09,521.91 671.09,436.91 C7.2@674,434
  Bottom Layer w6: v1(622,288) 671,337 671,409 v1(696,434) R28.2@727,434
  Bottom Layer w10: R28.2@728,435 R33.2@728,462
VCAP1: C38.2 R28.1 U11.M10 | length 520.3
  Top Layer w4: U11.M10@1074.36,498.18 v1(1087.16,510.98)
  Signal Layer 1 w4: v1(688,391) 709,391 765,447 1043,447 1052.09,456.09 1052.09,475.91 v1(1087.16,510.98)
  Bottom Layer w4: v1(688,391) 723.68,391 R28.1@728,395.32
VCAP2: C37.2 R33.1 U11.F13 | length 367.8
  Top Layer w4: v1(891,499) 888,499 888,518 897,527 917,527 933,543 v1@933,562.77 ; U11.F13@920.82,574.95 v1@933,562.77 ; v1(934.77,562.77) v1@933,562.77
  Signal Layer 1 w4: v1(695,491) 713,473 865,473 v1(891,499)
  Bottom Layer w4: v1(695,491) 705.68,501.68 R33.1@728,501.68
VDD_DIG: B1.2 B3.2 C25.2 C27.2 C34.1 C43.1 C47.1 C49.1 C50.1 C51.1 C52.1 C53.1 C70.2 C73.1 C75.1 C80.1 C82.2 C83.1 R25.2 R29.1 U4.A9 U4.A10 U4.D2 U4.D3 U4.E3 U4.F12 U4.K4 U4.M9 U4.M10 U10.1 U10.2 | length 1365.8
  Top Layer w4: C75.1@645.68,1666 704.01,1666 U4.M10@706.77,1668.76 U4.M9@706.77,1700.26 ; v1(754.02,1873.49) U4.K4@769.76,1857.74 ; v1(895.75,1582.75) U4.F12@895.75,1605.77 ; U4.E3@927.24,1889.24 v1(942.99,1904.98) U4.D2@958.74,1920.73 ; U4.D3@958.74,1889.24 v1(974.49,1904.98) ; U4.A9@1053.23,1700.26 U4.A10@1053.23,1668.76 1062.46,1678 1080,1678 v1(1078,1676) ; B3.2@1139,1764.72 v1(1139,1781)
  Top Layer w6: v1(617.16,1743) 619,1743 623,1739 B1.2@623,1729.28 623,1688.69 C75.1@645.68,1666
  Top Layer w10: U10.2@-472.29,2134.66 C25.2@-408.14,2134.66 ; C25.2@-390.75,2152.05 C25.2@-397.35,2145.46 C25.2@-408.14,2134.66 ; R29.1@-390.75,2232.43 -390.75,2193.86 -315.35,2118.46 v2(-315.35,2053.46) ; -345.35,2023.46 -433.35,2023.46 C27.2@-462.35,2052.46 -462.35,2099.13 U10.1@-472.29,2109.07 -433.73,2109.07 C25.2@-408.14,2134.66 ; v1(895.75,1582.75) 911.32,1567.18 C43.1@911.32,1561 C47.1@911.32,1530
  Top Layer w15: C25.2@-397.35,2145.46 -331.35,2079.46 -331.35,2037.46 v2(-315.35,2053.46) ; C34.1@-391.66,2192.46 R29.1@-391.66,2231.52
  Signal Layer 1 w6: v1(617.16,1743) v1@618,1743.84
  Bottom Layer w4: v1(942.99,1904.98) v1(974.49,1904.98) C52.1@985.32,1915.81
  Bottom Layer w10: C80.1@1085.31,1682 1085.31,1703 C70.2@1142,1759.69 ; C70.2@1139,1761 v1(1139,1781)
VDDA_RX_LO: C19.2 C21.2 C33.1 C54.2 C56.1 C57.1 C58.1 C59.1 C60.1 C61.1 C64.1 C65.1 R23.1 R25.1 U4.B9 U4.B10 U4.E2 U4.F2 U4.J3 U4.K3 U8.1 U8.2 | length 795.2
  Top Layer w4: v1(754.02,1904.98) U4.K3@769.76,1889.24 ; v1(785.51,1904.98) U4.J3@801.26,1889.24 ; U4.B9@1021.73,1700.26 U4.B10@1021.73,1668.76 1040.23,1650.27 C56.1@1128.42,1650.27
  Top Layer w6: U4.F2@895.75,1920.73 U4.E2@927.24,1920.73 928.73,1920.73 v1(943,1935)
  Top Layer w10: U8.2@-558.97,1008.08 C19.2@-486.82,1008.08 ; C21.2@-539.02,924.87 -539.02,962.54 U8.1@-558.97,982.49 -512.41,982.49 C19.2@-486.82,1008.08 ; C33.1@-478.34,1065.87 R23.1@-478.34,1105.87 -452.8,1131.41 R25.1@-414.02,1131.41 v2@-414.02,1104.87 ; v2(-405.38,1104.87) v2@-414.02,1104.87 ; C56.1@1134,1644.68 1159.32,1670 v1(1161,1670) ; C19.2@-486.82,1008.08 C19.2@-486.02,1008.87 -458.02,1008.87 -414.02,1052.87 v2@-414.02,1104.87
  other v1: 914,2023
VSYNC: P3.7 U2.V10 | length 247
  Top Layer w4: U2.V10@1273.72,1054.75 1273.97,1055 v1(1320,1055) ; v1(1395,985) 1395,978 1407,966 1446.77,966 P3.7@1447.23,965.54
  Bottom Layer w4: v1(1320,1055) 1378,1055 1392,1041 1392,986 1394,986 v1(1395,985)
pads on no net: P3.1 U2.A2 U2.A3 U2.A10 U2.A11 U2.A12 U2.A13 U2.A14 U2.A15 U2.A16 U2.B2 U2.B3 U2.B8 U2.B11 U2.B12 U2.B14 U2.B16 U2.C4 U2.C5 U2.C6 U2.C7 U2.C8 U2.C12 U2.C13 U2.C14 U2.C15 U2.D6 U2.D8 U2.D9 U2.D12 U2.D14 U2.E6 U2.E7 U2.E8 U2.E11 U2.E12 U2.E13 U2.F7 U2.F8 U2.F9 U2.F10 U2.F11 U2.F12 U2.F13 U2.F14 U2.G8 U2.G9 U2.G11 U2.G13 U2.G14 U2.H5 U2.H6 U2.H7 U2.H12 U2.H13 U2.H14 U2.J6 U2.J7 U2.J13 U2.K2 U2.K5 U2.K6 U2.K12 U2.K13 U2.K14 U2.L5 U2.L6 U2.L7 U2.L12 U2.L13 U2.L14 U2.M5 U2.M8 U2.M10 U2.M11 U2.M13 U2.M14 U2.N3 U2.N4 U2.N5 U2.N6 U2.N7 U2.N8 U2.N9 U2.N10 U2.N11 U2.N14 U2.P3 U2.P4 U2.P6 U2.P7 U2.P8 U2.P11 U2.P12 U2.R3 U2.R5 U2.R7 U2.R8 U2.R10 U2.R11 U2.T3 U2.T4 U2.T5 U2.T6 U2.T7 U2.T8 U2.T9 U2.T10 U2.T14 U2.U1 U2.U2 U2.U5 U2.U7 U2.U8 U2.V4 U2.V5 U2.V6 U2.V7 U2.V8 U2.V9 U4.A3 U4.M3 U4.M11 U6.4 U7.4 U9.3 U9.10 U11.A5 U11.A7 U11.A8 U11.A9 U11.A13 U11.B4 U11.B6 U11.B7 U11.B8 U11.B9 U11.B10 U11.B15 U11.C2 U11.C3 U11.C4 U11.C10 U11.C13 U11.C14 U11.D1 U11.D2 U11.D3 U11.D4 U11.D13 U11.D14 U11.E1 U11.E2 U11.E3 U11.E4 U11.E12 U11.E13 U11.E14 U11.F1 U11.F4 U11.G4 U11.G15 U11.H1 U11.H2 U11.H3 U11.H4 U11.H14 U11.H15 U11.J2 U11.J3 U11.J4 U11.J14 U11.J15 U11.K1 U11.K2 U11.K3 U11.K12 U11.K13 U11.K14 U11.K15 U11.L1 U11.L2 U11.L3 U11.L12 U11.L13 U11.L15 U11.M3 U11.M6 U11.M7 U11.M11 U11.M12 U11.M13 U11.N2 U11.N5 U11.N6 U11.N7 U11.N12 U11.P5 U11.P6 U11.P7 U12.4
copper on no net: | length 2383
  Top Layer w4: v1(785.53,881.52) 801.28,897.27 ; v1(785.53,913.02) 801.28,928.76 ; v1(785.53,944.51) 801.28,960.26 ; v1(785.53,1133.49) 801.28,1117.74 ; v1(785.53,1196.48) 801.28,1180.73 ; v1(785.53,1227.98) 801.28,1212.23 ; v1(817.02,1133.49) 832.77,1117.74 ; v1(817.02,1196.48) 832.77,1180.73 ; v1(831.25,306.25) 844.05,319.05 ; v1(831.25,331.84) 844.05,344.64 ; v1(831.25,510.98) 844.05,498.18 ; v1(848.52,913.02) 864.27,928.76 ; v1(848.52,944.51) 864.27,960.26 ; v1(848.52,1101.99) 864.27,1086.24 ; v1(848.52,1133.49) 864.27,1117.74 ; v1(848.52,1164.98) 864.27,1149.24 ; v1(856.84,306.25) 869.64,319.05 ; v1(856.84,331.84) 869.64,344.64 ; v1(856.84,587.75) 869.64,574.95 ; v1(880.02,944.51) 895.76,960.26 ; v1(880.02,976.01) 895.76,991.76 ; v1(880.02,1070.5) 895.76,1054.75 ; v1(880.02,1101.99) 895.76,1086.24 ; v1(880.02,1133.49) 895.76,1117.74 ; v1(880.02,1164.98) 895.76,1149.24 ; v1(880.02,1196.48) 895.76,1180.73 ; v1(882.43,306.25) 895.23,319.05 ; v1(882.43,331.84) 895.23,344.64 ; v1(882.43,562.16) 895.23,549.36 ; v1(882.43,587.75) 895.23,574.95 ; v1(908.02,331.84) 920.82,344.64 ; v1(911.51,976.01) 927.26,991.76 ; v1(911.51,1007.5) 927.26,1023.25 ; v1(911.51,1101.99) 927.26,1086.24 ; v1(911.51,1164.98) 927.26,1149.24 ; v1(933.61,331.84) 946.41,344.64 ; v1(943.01,881.52) 958.76,897.27 ; v1(943.01,913.02) 958.76,928.76 ; v1(943.01,944.51) 958.76,960.26 ; v1(943.01,1133.49) 958.76,1117.74 ; v1(943.01,1164.98) 958.76,1149.24 ; v1(943.01,1196.48) 958.76,1180.73 ; 972,319.05 v1(984.8,306.25) ; 972,344.64 v1(984.8,331.84) ; v1(974.5,913.02) 990.25,928.76 ; v1(974.5,944.51) 990.25,960.26 ; v1(974.5,1164.98) 990.25,1149.24 ; 997.59,319.05 v1(1010.39,306.25) ; 997.59,344.64 v1(1010.39,331.84) ; 1021.75,897.27 v1(1037.5,881.52) ; 1021.75,928.76 v1(1037.5,913.02) ; 1021.75,1117.74 v1(1037.5,1133.49) ; 1021.75,1149.24 v1(1037.5,1164.98) ; 1021.75,1180.73 v1(1037.5,1196.48) ; 1023.18,319.05 v1(1035.98,306.25) ; 1023.18,549.36 v1(1035.98,562.16) ; 1023.18,574.95 v1(1035.98,587.75) ; 1048.77,319.05 v1(1061.57,306.25) ; 1048.77,549.36 v1(1061.57,562.16) ; 1048.77,574.95 v1(1061.57,587.75) ; 1053.24,897.27 v1(1068.99,881.52) ; 1053.24,928.76 v1(1068.99,913.02) ; 1053.24,960.26 v1(1068.99,944.51) ; 1053.24,1117.74 v1(1068.99,1133.49) ; 1053.24,1149.24 v1(1068.99,1164.98) ; 1053.24,1180.73 v1(1068.99,1196.48) ; 1074.36,319.05 v1(1087.16,306.25) ; 1074.36,395.82 v1(1087.16,383.02) ; 1074.36,421.41 v1(1087.16,408.61) ; 1074.36,523.77 v1(1087.16,536.57) ; 1074.36,549.36 v1(1087.16,562.16) ; 1074.36,574.95 v1(1087.16,587.75) ; 1084.74,897.27 v1(1100.49,881.52) ; 1084.74,991.76 v1(1100.49,976.01) ; 1084.74,1054.75 v1(1100.49,1070.5) ; 1084.74,1086.24 v1(1100.49,1101.99) ; 1084.74,1149.24 v1(1100.49,1164.98) ; 1084.74,1180.73 v1(1100.49,1196.48) ; 1099.95,370.23 v1(1112.75,357.43) ; 1099.95,395.82 v1(1112.75,383.02) ; 1099.95,421.41 v1(1112.75,408.61) ; 1099.95,549.36 v1(1112.75,562.16) ; 1116.24,834.28 v1(1131.98,818.53) ; 1116.24,865.77 v1(1131.98,850.02) ; 1116.24,897.27 v1(1131.98,881.52) ; 1116.24,928.76 v1(1131.98,913.02) ; 1116.24,960.26 v1(1131.98,944.51) ; 1116.24,991.76 v1(1131.98,976.01) ; 1116.24,1023.25 v1(1131.98,1007.5) ; 1116.24,1054.75 v1(1131.98,1070.5) ; 1116.24,1086.24 v1(1131.98,1101.99) ; 1116.24,1180.73 v1(1131.98,1196.48) ; 1147.73,834.28 v1(1163.48,818.53) ; 1147.73,865.77 v1(1163.48,850.02) ; 1147.73,928.76 v1(1163.48,913.02) ; 1147.73,960.26 v1(1163.48,944.51) ; 1147.73,991.76 v1(1163.48,976.01) ; 1147.73,1086.24 v1(1163.48,1101.99) ; 1179.23,834.28 v1(1194.98,818.53) ; 1179.23,897.27 v1(1194.98,881.52) ; 1179.23,960.26 v1(1194.98,944.51) ; 1179.23,991.76 v1(1194.98,976.01) ; 1179.23,1054.75 v1(1194.98,1070.5) ; 1179.23,1086.24 v1(1194.98,1101.99) ; 1210.72,834.28 v1(1226.47,818.53) ; 1210.72,865.77 v1(1226.47,850.02) ; 1210.72,897.27 v1(1226.47,881.52) ; 1210.72,928.76 v1(1226.47,913.02) ; 1210.72,960.26 v1(1226.47,944.51) ; 1210.72,991.76 v1(1226.47,976.01) ; 1210.72,1023.25 v1(1226.47,1007.5) ; 1210.72,1054.75 v1(1226.47,1070.5) ; 1210.72,1180.73 v1(1226.47,1196.48)
  other v4: 980,649

## Polygon pours and split planes (outlines as drawn)
1.8D on Bottom Layer "Bottom Layer-No Net" (solid, remove dead copper, pour order 9): 848,1324 1336,1310.84 1163.48,1227.98 969.52,1163.32 882.15,1221.56
1.8D on Bottom Layer "Bottom Layer-No Net" (solid, remove dead copper, pour order 11): 754,1197 754.03,1164.98 817.02,1133.49 817.02,1090.25 713.26,886.11 785.53,881.52 848.52,944.51 880.02,1133.49 785.53,1196.48
3.3D on Bottom Layer "Bottom Layer-No Net" (solid, remove dead copper, pour order 13): 935.28,782.36 910.79,858.49 860.26,888.34 838.65,892.05 699.99,864.99 613.72,778.72
3.3D on Bottom Layer "Bottom Layer-No Net" (solid, remove dead copper, pour order 14): 933.61,587.75 933.61,485.39 831.25,485.39 831.25,306.25 858,281.82 1035.98,331.84 1112.75,459.8 1113,589 933.61,587.75
3.3D on Bottom Layer "Bottom Layer-No Net" (solid, remove dead copper, pour order 15): 1412,1280 1292,1281 1073,1150 997,1158 827,1248 785.53,1196.48 911.51,1133.49 790,779 1292,778 1412,1280
1.8D on Bottom Layer "Bottom Layer-No Net" (solid, remove dead copper, pour order 16): 746.82,932.37 674.4,932.17 598.93,871.74 592.92,870.56 521.56,808.02 558.27,800.35 728,879
5V on Top Layer "Bottom Layer-No Net" (solid, remove dead copper, pour order 12): 522.48,975.76 cw(c527.23,977.35) 522.47,975.78 518.91,986.46 511.18,1005.8 509.5,1005.8 cw(c509.5,1010.82) 505.97,1014.38 505.96,1014.36 507.24,1015.64 503.22,1025.68 cw(c507.87,1027.56) 502.86,1027.56 502.86,1074.8 cw(c507.87,1074.8) 507.87,1079.82 555.12,1079.82 cw(c555.12,1074.8) 560.13,1074.8 560.13,1036.05 567.83,1005.2 600.98,999.93 601.01,999.92 ccw(c600.23,994.99) 600.99,999.93 ccw(c600.21,994.97) 600.98,999.93 601.01,999.92 618.88,997.08 618.9,997.08 618.88,997.08 cw(c618.11,992.13) 623.13,992.13 623.13,940.94 cw(c618.11,940.94) 618.04,935.93 612.01,936 612.01,905 cw(c602,905) 591.99,905 591.99,936.25 538.98,936.91 cw(c539.03,941.92) 534.27,940.36 534.27,940.34 534.27,940.36 528.38,958.04 528.37,958.06 528.37,958.07 ccw(c533.12,959.65) 528.37,958.06 ccw(c533.14,959.62) 528.38,958.04 528.37,958.07
NetL13_1 on Top Layer "Bottom Layer-No Net" (solid, remove dead copper, pour order 10): 263.78,912.31 385.83,912.31 ccw(c385.83,917.32) 389.74,914.19 403.99,931.99 430.11,931.99 ccw(c430.11,937.01) 435.13,937.01 435.13,983.28 ccw(c430.11,983.28) 433.64,986.84 433.66,986.82 432.68,987.8 432.7,987.78 ccw(c429.13,984.25) 429.13,989.27 401.57,989.27 ccw(c401.57,984.25) 397.49,987.17 379.31,961.71 263.78,961.71 ccw(c263.78,956.69) 258.76,956.69 258.76,917.32 ccw(c263.78,917.32)
RFGND on GND1 (split plane): 1656.31,1691.1 1237,1691.1 1235.05,1690.71 1233.4,1689.6 1084.89,1541.1 642,1541.1 640.05,1540.71 638.4,1539.6 397.89,1299.1 20.1,1299.1 20.1,2411.9 1656.31,2411.9
GND on GND1 (split plane): 1656.31,20.1 20.1,20.1 20.1,1288.9 400,1288.9 401.95,1289.29 403.6,1290.4 644.11,1530.9 1087,1530.9 1088.95,1531.29 1090.6,1532.4 1239.11,1680.9 1656.31,1680.9
3.3D on PWR (split plane): 1656.31,20.1 20.1,20.1 20.1,2411.9 1656.31,2411.9
5V on PWR2/GND2 (split plane): 785.27,871.22 785.18,871.24 783.23,870.85 781.57,869.75 780.47,868.09 780.08,866.14 780.47,864.19 781.57,862.54 782.3,861.8 782.3,750.14 472.44,440.28 398.8,513.92 398.8,651.43 702.02,954.65 703.13,956.31 703.51,958.26 703.51,1498.84 1412.89,1498.84
3.3D on PWR2/GND2 (split plane): 1656.31,813.88 1571.2,728.77 1570.09,727.12 1569.71,725.16 1569.71,238.33 1454.58,123.21 789.51,123.21 479.65,433.07 791.01,744.43 792.11,746.08 792.5,748.03 792.5,863.92 792.48,864.01 1427.31,1498.84 1656.31,1498.84
GND on PWR2/GND2 (split plane): 1656.31,1509.03 698.42,1509.03 696.46,1508.65 694.81,1507.54 693.71,1505.89 693.32,1503.94 693.32,960.37 398.8,665.85 398.8,1062.99 398.41,1064.94 397.31,1066.6 357.94,1105.97 356.28,1107.07 354.33,1107.46 20.1,1107.46 20.1,2411.9 1656.31,2411.9
5V on PWR2/GND2 (split plane): 388.6,1060.88 388.6,511.81 388.99,509.86 390.1,508.21 783.8,114.51 785.45,113.4 787.4,113.01 1456.69,113.01 1458.64,113.4 1460.3,114.51 1578.41,232.62 1579.51,234.27 1579.9,236.22 1579.9,723.05 1656.31,799.47 1656.31,20.1 20.1,20.1 20.1,1097.26 352.22,1097.26

## Keep-outs
Keep-Out Layer:
  lines w10: 108,0 0,0 ; 0,0 1676.41,0 1676.41,2432 0,2432 0,0

## Other copper
GND1 (plane layer: these items are gaps in the copper):
  lines w10: 0,1294 400,1294 642,1536 1087,1536 1237,1686 1676.41,1686
PWR2/GND2 (plane layer: these items are gaps in the copper):
  lines w10: 393.7,653.54 698.42,958.26 698.42,1503.94 1425.2,1503.94 ; 785.18,866.14 787.4,863.92 787.4,748.03 472.44,433.07 ; 787.4,866.14 1425.2,1503.94 ; 1676.41,1503.94 1425.2,1503.94 ; 0,0 0,0 ; 0,0 0,1102.36 354.33,1102.36 393.7,1062.99 393.7,511.81 787.4,118.11 1456.69,118.11 1574.8,236.22 1574.8,725.16 1676.41,826.77 1676.41,0 ; 0,0 1676.41,0 ; 472.44,433.07 472.44,433.07 ; 1676.41,0 1676.41,0

## Text inside footprints (layer, text, board x,y; h text height)
U4: Top Overlay "1" at 1105,1939 h50; Top Overlay "A" at 1050,2029 h50 r270